# EAGLE board Q3 force sensor with LED (EAGLE 9.7.0)

Size 248.45 x 104.43 mm. Coordinates in mm from the lower left corner, seen from the top.
Outline: 0,0 248.45,0 248.45,104.43 0,104.43 0,0
Copper layers (1*16): Top 0.035mm / dielectric 1.5mm / Bottom 0.035mm
Design rules "default": minimum track width 6mil, minimum drill 0.35mm, track to track 6mil, track to pad 6mil, pad to pad 6mil, via to via 6mil, smd to smd 6mil, copper to edge 40mil, drill to drill 6mil, minimum pad ring 10mil, minimum via ring 8mil, stop-mask expansion 4mil, vias tented up to drill 0mil, thermal gap 10mil

## Footprints (pad centres in the part's own frame; a part is rotated, then mirrored left to right if it is on the bottom)
LEDRD254W60D565H860B = drill 0.981 pad 1.581: 1 -1.27,0; 2 1.27,0
RESAD1016W63L850D250B = drill 0.83 pad 1.43: 1 -5.08,0; 2 5.08,0
1X02 = drill 1.016 long: 1 -1.27,0; 2 1.27,0
HA-06-SM065 = drill 1 pad 1.676: 1 -2.54,-2.54; 2 0,2.54; 3 2.54,-2.54
JHD-162A = drill 1.016 long: 1 -19.05,0; 2 -16.51,0; 3 -13.97,0; 4 -11.43,0; 5 -8.89,0; 6 -6.35,0; 7 -3.81,0; 8 -1.27,0; 9 1.27,0; 10 3.81,0; 11 6.35,0; 12 8.89,0; 13 11.43,0; 14 13.97,0; 15 16.51,0; 16 19.05,0
ARDUINO-UNO-R3-SHIELD = drill 1.016 pad 1.88: 3.3V 24.13,-2.54; 5V 24.13,0; A0 24.13,12.7; A1 24.13,15.24; A2 24.13,17.78; A3 24.13,20.32; A4 24.13,22.86; A5 24.13,25.4; AREF -24.13,-13.97; D2 -24.13,20.32; D3 -24.13,17.78; D4 -24.13,15.24; D5 -24.13,12.7; D6 -24.13,10.16; D7 -24.13,7.62; D8 -24.13,3.81; D9 -24.13,1.27; D10 -24.13,-1.27; D11 -24.13,-3.81; D12 -24.13,-6.35; D13 -24.13,-8.89; GND@0 24.13,2.54; GND@1 24.13,5.08; GND@2 -24.13,-11.43; IOREF 24.13,-7.62; NC 24.13,-10.16; RES 24.13,-5.08; RX -24.13,25.4; SCL -24.13,-19.05; SDA -24.13,-16.51; TX -24.13,22.86; VIN 24.13,7.62

## Placement (x,y rotation side)
D1  RED  [LEDRD254W60D565H860B]  33.61,85.31 180 top
R1  1k  [RESAD1016W63L850D250B]  32.34,80.23 90 top
R2  1k  [RESAD1016W63L850D250B]  169.72,49.2 90 top
R3  1k  [RESAD1016W63L850D250B]  241.47,79.63 90 top
R4  FORCE-SENSOR  [1X02]  242.74,84.71 0 top
RPOT1  220k  [HA-06-SM065]  184.96,97.38 0 top
U1  LCD-16X2JHD-162A  [JHD-162A]  153.21,36.63 0 top
U2  ARDUINO-UNO-R3-SHIELD  [ARDUINO-UNO-R3-SHIELD]  47.88,33.87 270 top

## Library data of the parts
D1 = Tinkercad; CATEGORY: Opto-Electronic; SUB-CATEGORY: LED; VALUE: LED_RED
R1-R4 RPOT1 U1 U2 = Tinkercad

## Nets
D1_C: D1.2 R1.2
U1_LED+: R2.1 U1.15
U1_VO: RPOT1.2 U1.3
U2_5V: R2.2 R4.2 RPOT1.3 U1.2 U2.5V
U2_A0: R3.2 R4.1 U2.A0
U2_D3: U1.14 U2.D3
U2_D4: U1.13 U2.D4
U2_D5: U1.12 U2.D5
U2_D6: U1.11 U2.D6
U2_D7: U1.6 U2.D7
U2_D8: U1.4 U2.D8
U2_D11: D1.1 U2.D11
U2_GND: R1.1 R3.1 RPOT1.1 U1.1 U1.5 U1.16 U2.GND@0 U2.GND@1 U2.GND@2

## Tracks (layer width: path | path; a pad name or v marks a point on that pad's centre or on a via)
D1_C  (1 unrouted)
U1_LED+  (1 unrouted)
U1_VO  (1 unrouted)
U2_5V  (4 unrouted)
U2_A0  (2 unrouted)
U2_D3  (1 unrouted)
U2_D4  (1 unrouted)
U2_D5  (1 unrouted)
U2_D6  (1 unrouted)
U2_D7  (1 unrouted)
U2_D8  (1 unrouted)
U2_D11  (1 unrouted)
U2_GND  (8 unrouted)